# Altium PCB portal.PcbDoc
Units mil, origin at the board's own origin, x right, y up, seen from the top; angles counter-clockwise.
Board outline 2360.35 x 1180 mil, 4 copper layers (Top Layer, GND, ALIMS, Bottom Layer), stack 23.756 mil thick; 21 components, 25 nets, 99 pads, 10 vias.
Unrouted connection lines stored in the file: 27.
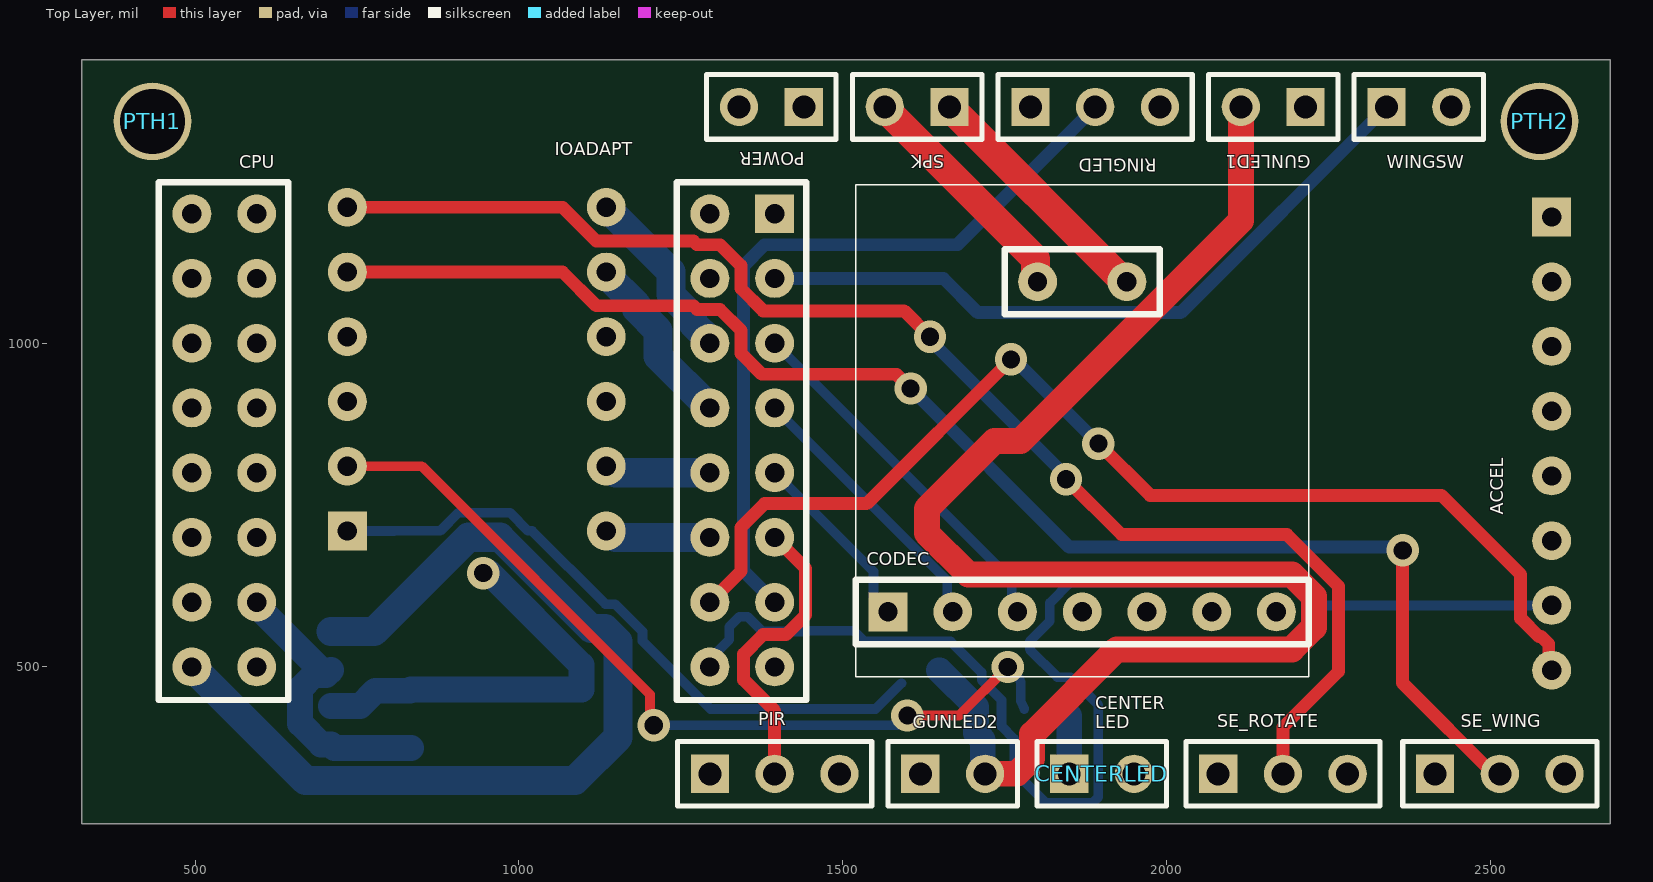
[diagram p0: Top Layer view]
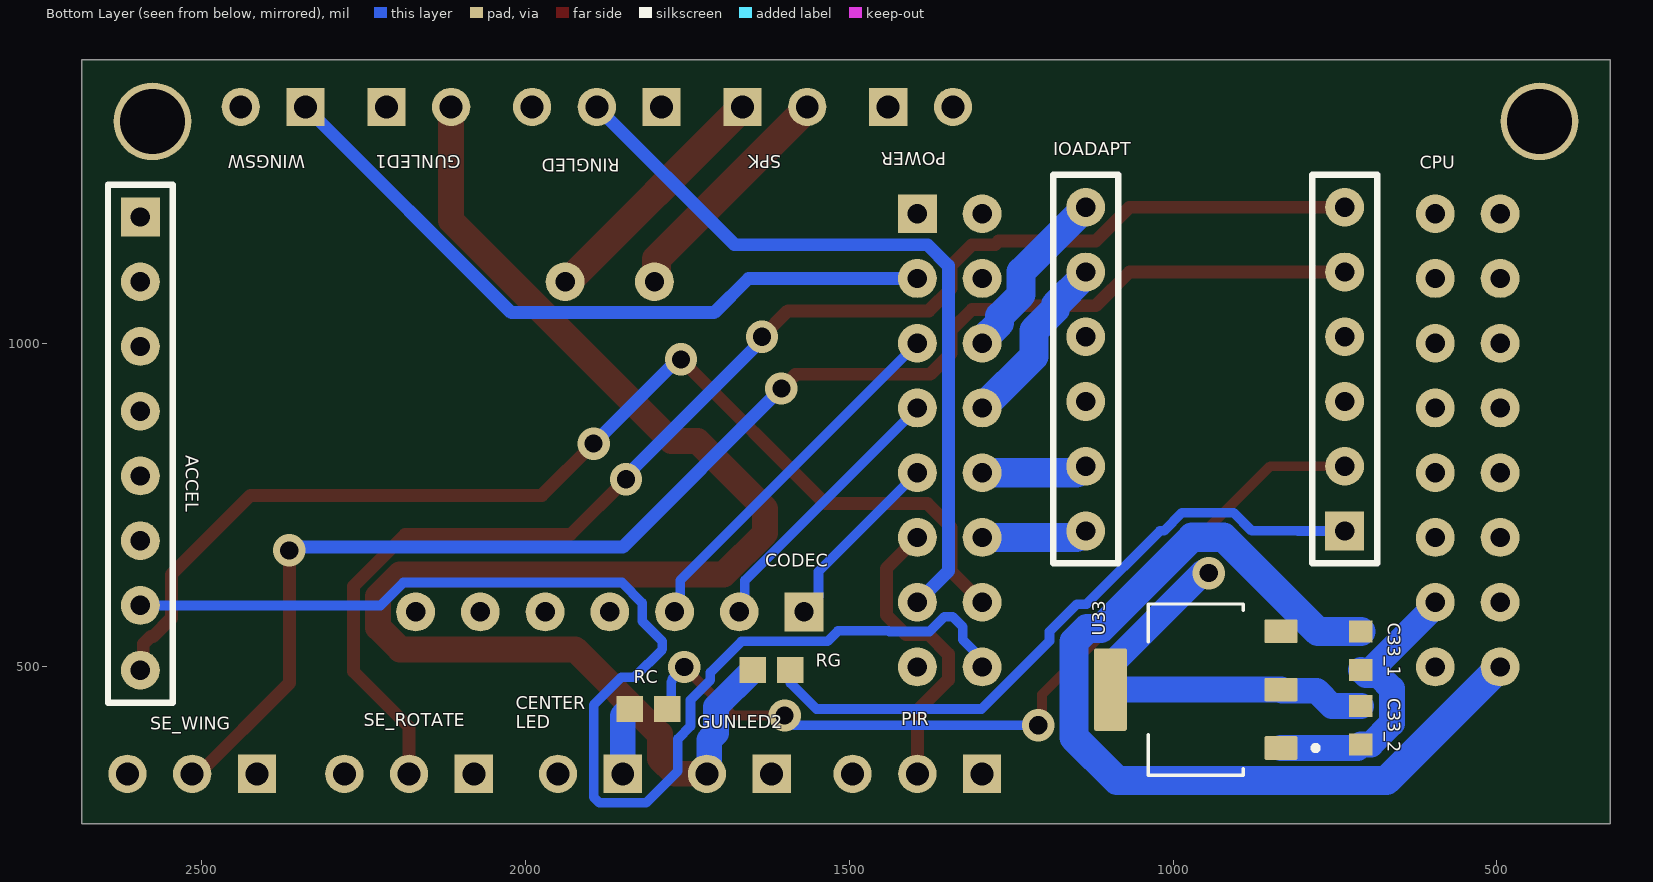
[diagram p1: Bottom Layer view, seen from below]
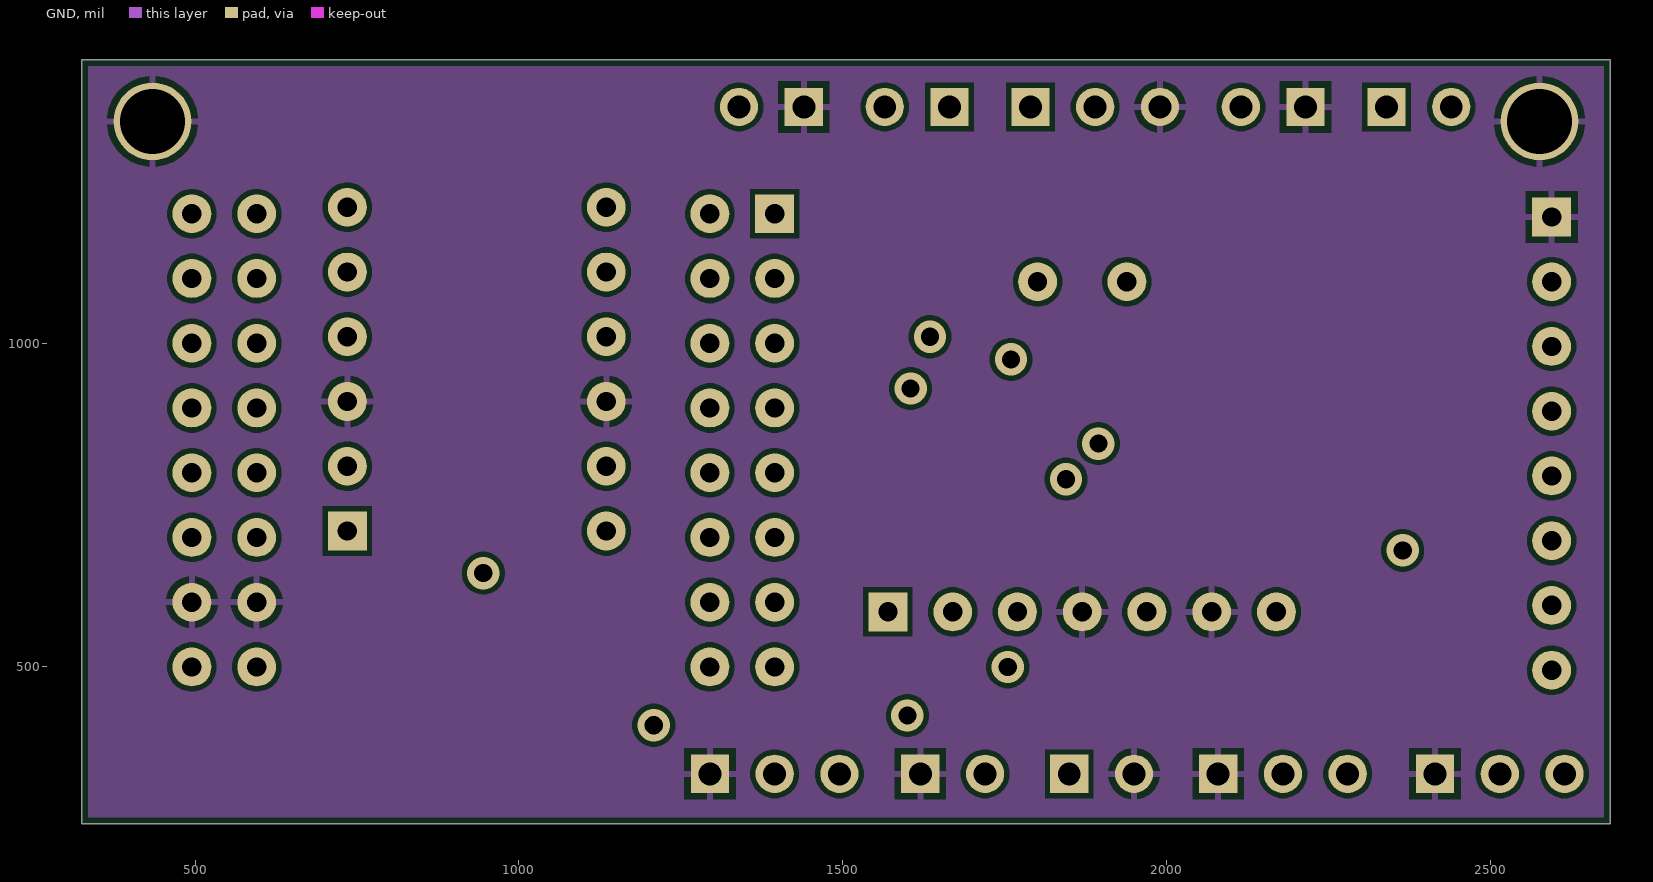
[diagram p2: GND]
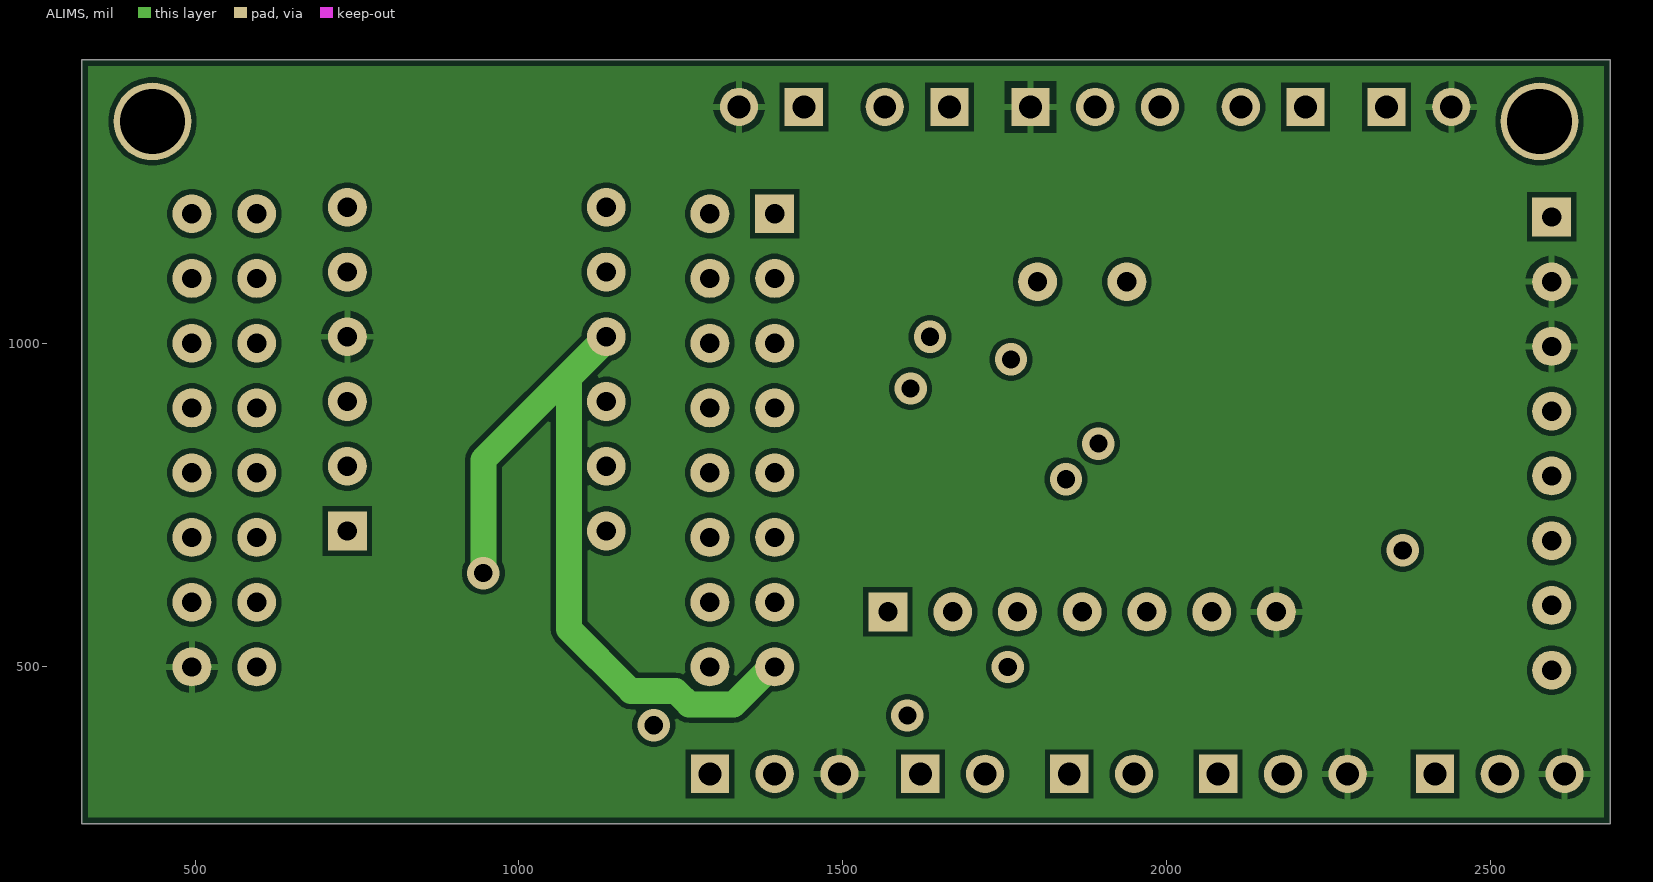
[diagram p3: ALIMS]
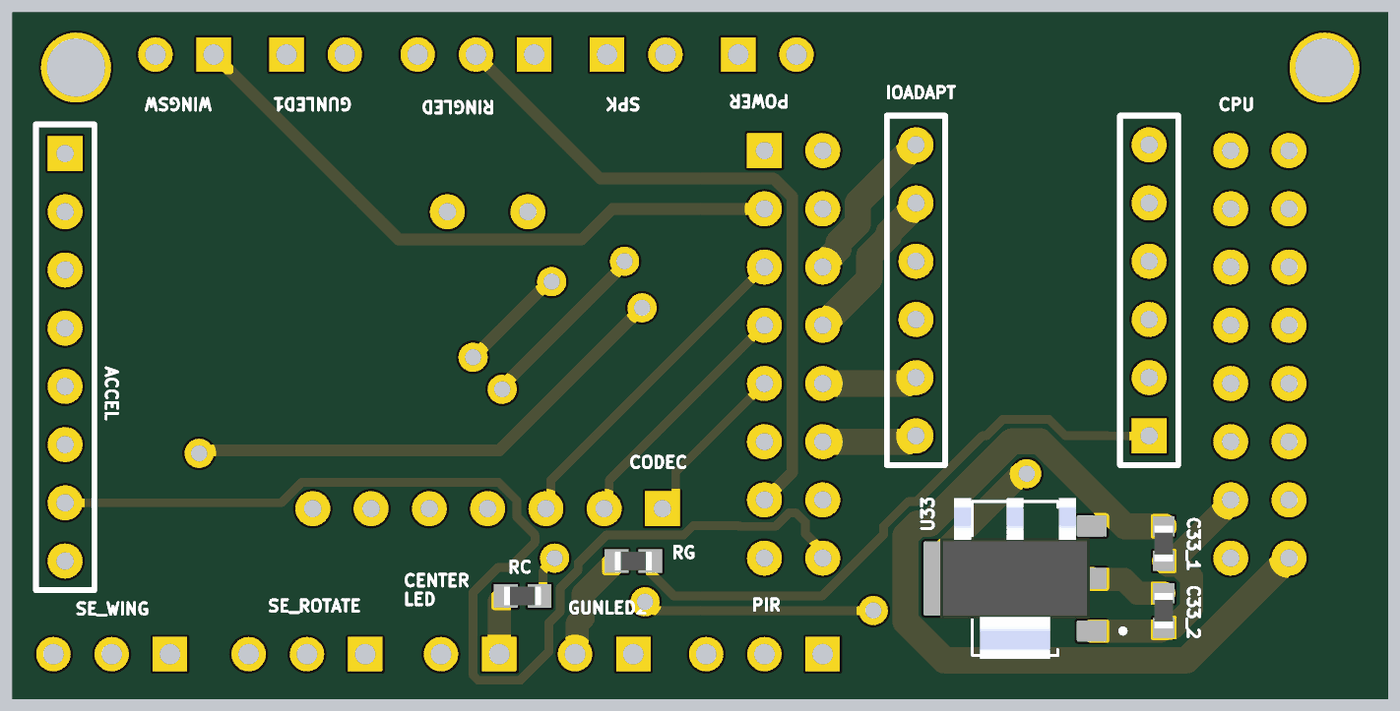
[diagram p4: 3D render of the assembled board from below, using the file's embedded part models]

## Layer stack, top to bottom
Top Solder: solder mask 0.4, Solder Resist, Dk 3.5
Top Layer: signal copper 1.4
Dielectric 2: prepreg 2.8, PP-006, Dk 4.1
GND: signal copper 1.378
Dielectric 1: dielectric 12.6, FR-4, Dk 4.8
ALIMS: signal copper 1.378
Dielectric 3: prepreg 2.8, PP-006, Dk 4.1
Bottom Layer: signal copper 1.4
Bottom Solder: solder mask 0.4, Solder Resist, Dk 3.5

## Board outline
325,257.64 325,1437.64 2685.35,1437.64 2685.35,257.64

## Design rules (kind name [scope] priority, off if disabled: settings)
BoardOutlineClearance [All] p1: gap=10 ignorepadtopadclearanceinfootprint=FALSE except(0: Arc-SplitContinuation Track-SplitContinuation SMDPad-SplitContinuation THPad-SplitContinuation Via-SplitContinuation Fill-SplitContinuation Poly-SplitContinuation Region-SplitContinuation Text-SplitContinuation)
Clearance [All] p1: gap=7.87 ignorepadtopadclearanceinfootprint=FALSE
MinimumSolderMaskSliver [All] p1: minsoldermaskwidth=3
PolygonConnect [All] p1: connectstyle=Relief reliefconductorwidth=10 reliefentries=4 polygonreliefangle="90 Angle" airgapwidth=10
RoomDefinition portal [InComponentClass('portal')] p1: confinementstyle=ConfineIn formatcopy=TRUE lockcomponents=FALSE outline 0,0 2850,0 2850,1680 0,1680
RoutingVias [All] p1: holewidth=28 width=50 viastyle="Through Hole" minholewidth=28 minwidth=50 maxholewidth=28 maxwidth=50
SolderMaskExpansion [All] p1: expansion=4 istentingtop=FALSE
Width [All] p1: maxlimit=45 minlimit=10 preferedwidth=10 minimp=50.000000 maximp=50.000000 favimp=50.000000
29 further rules are at their usual default settings.

## Components (designator, comment, footprint, x,y, rotation, side; value= is the part's Value field where it differs from the comment)
ACCEL "ADXL345" ADXL345 2645,845 r180 bottom
C33_1 "5uF" RESC1508X55N 710,525 r270 bottom value=4.7uF
C33_2 "5uF" RESC1508X55N 710,410 r270 bottom value=4.7uF
CENTERLED "CENTERLED" "HEADER 2" 2000,385 r180 top
CODEC "MAX98357" MAX98357 1870,485 r90 top
CPU "Wemos S2 mini" "WEMOS S2 MINI" 444,149 r0 top
GUNLED1 "" "HEADER 2" 2065,1315 r0 top
GUNLED2 "" "HEADER 2" 1770,385 r180 top
IOADAPT "4 Way IIC I2C Level Conversion Module" IOADAPT 685,660 r90 bottom
PIR "" "HEADER 3" 1545,385 r180 top
POWER "" "HEADER 2" 1290,1315 r0 top
PTH1 "MTSW-101-22-T-S-395" SAMTEC_MTSW-101-22-T-S-395 434.06,1342.64 r0 top
PTH2 "MTSW-101-22-T-S-395" SAMTEC_MTSW-101-22-T-S-395 2576.3,1342.64 r90 top
RC "20R" RESC1607X60N 1810,435 r180 bottom
RG "20R" RESC1607X60N 1620,495 r180 bottom
RINGLED "" "HEADER 3" 2040,1415 r180 top
SE_ROTATE "" "HEADER 3" 2330,385 r180 top
SE_WING "" "HEADER 3" 2665,385 r180 top
SPK "" "HEADER 2" 1515,1315 r0 top
U33 "AMS1117_3V3" SOT229P700X180-4N 965,465 r0 bottom
WINGSW "" "HEADER 2" 2490,1415 r180 top

## Footprints (in the part's own frame and the unit in brackets; to place one, negate y for a bottom-side part, rotate by r counter-clockwise, add the part's x,y. Pads: shape width x height; smd on the part's side, far side on the other; paste and mask are expansions set on the pad)
ADXL345 [mil]
  rect 60x60 hole 30: 1(50,350)
  round 60 hole 30: 2(50,250) 3(50,150) 4(50,50) 5(50,-50) 6(50,-150) 7(50,-250) 8(50,-350)
  silkscreen extent 0,-400 100,400
"HEADER 2" [mm]
  rect 1.5x1.5 hole 0.9: 1(3.81,1.27)
  round 1.5 hole 0.9: 2(1.27,1.27)
  silkscreen extent 0,0 5.08,2.54
"HEADER 3" [mm]
  rect 1.5x1.5 hole 0.9: 1(6.35,1.27)
  round 1.5 hole 0.9: 2(3.81,1.27) 3(1.27,1.27)
  silkscreen extent 0,0 7.62,2.54
IOADAPT [mil]
  rect 60x60 hole 30: 1(50,50)
  round 60 hole 30: 2(150,50) 3(250,50) 4(350,50) 5(450,50) 6(550,50) 7(550,450) 8(450,450) 9(350,450) 10(250,450) 11(150,450) 12(50,450)
  silkscreen extent 0,0 600,500
MAX98357 [mil]
  rect 60x60 hole 30: 1(100,300)
  round 60 hole 30: 2(100,200) 3(100,100) 4(100,0) 5(100,-100) 6(100,-200) 7(100,-300) 8(610,-69) 9(610,69)
  silkscreen extent 0,-350 760,350
RESC1508X55N [mm]
  rect 0.87x0.93 smd: 1(-0.755,0) 2(0.755,0)
  body extent -0.77,-0.4 0.77,0.4, height 0.55
RESC1607X60N [mm]
  rect 1.04x1.02 smd: 1(-0.735,0) 2(0.735,0)
  body extent -0.8,-0.4 0.8,0.4, height 0.55
SAMTEC_MTSW-101-22-T-S-395 [mil]
  round 120 hole 100: 01(0,0)
SOT229P700X180-4N [mm]
  rrect15% 1.31x0.93 smd: 1(-3.345,2.29) 2(-3.345,0) 3(-3.345,-2.29)
  rrect15% 1.31x3.24 smd: 4(3.345,0)
  silkscreen extent -4.8,-3.36 1.86,3.36, body extent -3.25,-3.5 3.25,3.5, height 1.8
"WEMOS S2 MINI" [mil]
  rect 60x60 hole 30: 1(951,1051)
  round 60 hole 30: 2(951,951) 3(951,851) 4(951,751) 5(951,651) 6(951,551) 7(951,451) 8(951,351) 9(851,1051) 10(851,951) 11(851,851) 12(851,751) 13(851,651) 14(851,551) 15(851,451) 16(851,351) 17(51,1051) 18(51,951) 19(51,851) 20(51,751) 21(51,651) 22(51,551) 23(51,451) 24(51,351) 25(151,1051) 26(151,951) 27(151,851) 28(151,751) 29(151,651) 30(151,551) 31(151,451) 32(151,351)
  silkscreen extent 0,300 1000,1100

## Part data
C33_1 C33_2: library part GJM0335C1E220GB01D, Package=None, Availability=Unavailable, MF="{'manufacturer': u'Murata'}", MP=GJM0335C1E220GB01D, Price=None
CENTERLED GUNLED1 GUNLED2 POWER SPK WINGSW: library part "HEADER 2"
IOADAPT: library part "IO Adapt"
PIR RINGLED SE_ROTATE SE_WING: library part "HEADER 3"
PTH1 PTH2: Package=None, Availability=Unavailable, MF="{'manufacturer': u'Samtec'}", MP=MTSW-101-22-T-S-395, Price=None
RC RG: library part RC0603FR-0720RL, Package=None, Availability=Unavailable, MF="{'manufacturer': u'Yageo'}", MP=RC0603FR-0720RL, Price=None
U33: library part AMS1117, "Sot223/Pkg 1-Amp 5-Volt Low Drop Out Voltage Regulatator", Package=None, Availability=Unavailable, MF="{'manufacturer': u'Advanced Monolithic Systems'}", MP=AMS1117, Price=None

## Via types
v1: diameter 50, hole 28, Top Layer to Bottom Layer, 10 vias

## Nets (pads, with @x,y where several pads share a name; then routed paths per layer and width w, separated by ;. In a path a pad name is that pad's centre, name@x,y a point inside that pad or via, vN(x,y) a via of type N, cw(c..) or ccw(c..) an arc to the next point about the centre after c; other vN are vias at no path point)
+3V3: C33_2.1 CPU.8 IOADAPT.9 U33.2 U33.4 | length 1954.7
  ALIMS w40: v1(945,645) 945,820 IOADAPT.9 1135,1004.59 1077.13,946.71 1077.13,558.85 1173.1,462.87 1242.03,462.87 1262.78,442.13 1331.71,442.13 1389.59,500 CPU.8
  Bottom Layer w40: C33_2.1 754.72,439.72 778.31,463.31 831.61,463.31 U33.2 U33.4 1096.69,502.99 954.69,645 v1(945,645)
+5: ACCEL.2 ACCEL.3 C33_1.1 CODEC.7 CPU.24 IOADAPT.4 PIR.3 POWER.2 RINGLED.1 SE_ROTATE.3 SE_WING.3 U33.3 WINGSW.2 | length 1476.3
  Bottom Layer w45: CPU.24 670.53,324.47 1086.42,324.47 1152.85,390.9 1152.85,539.1 1132.8,559.15 1111.77,559.15 970.55,700.37 922.06,700.37 776.41,554.72 C33_1.1
CENTER_LED: CPU.13 IOADAPT.11 | length 164.1
  Bottom Layer w45: IOADAPT.11 1139.06,810 1149.06,800 CPU.13
CO_BCLK: CODEC.2 CPU.4 | length 428.9
  Bottom Layer w15: CPU.4 1661.39,633.61 1661.39,593.61 CODEC.2
CO_DIN: CODEC.3 CPU.3 | length 570.3
  Bottom Layer w15: CPU.3 1761.39,633.61 1761.39,593.61 CODEC.3
CO_LRC: CODEC.1 CPU.5 | length 287.5
  Bottom Layer w15: CPU.5 1547.5,647.5 1547.5,607.5 CODEC.1
GND: ACCEL.1 C33_1.2 C33_2.2 CENTERLED.2 CODEC.4 CODEC.6 CPU.23 CPU.31 GUNLED1.1 GUNLED2.1 IOADAPT.3 IOADAPT.10 PIR.1 POWER.1 PTH1.01 PTH2.01 RINGLED.3 SE_ROTATE.1 SE_WING.1 U33.1 | length 446.5
  Bottom Layer w40: CPU.31 595,594.87 C33_1.2@694.6,495.28 ; C33_1.2 702.32,487.6 683.02,487.6 662.13,466.7 662.13,412.75 694.6,380.28 C33_2.2 715.43,374.84 U33.1
GUN_LEDS: CPU.14 IOADAPT.12 | length 164.1
  Bottom Layer w45: IOADAPT.12 1139.06,710 1149.06,700 CPU.14
MMWAVE_RX: CPU.10
MMWAVE_TX: CPU.9
NetCENTERLED_1: CENTERLED.1 RC.1 | length 104.8
  Bottom Layer w40: RC.1 1839.33,435 1850,424.33 CENTERLED.1
NetCODEC_8: CODEC.8 SPK.1 | length 385.8
  Top Layer w45: SPK.1 1935,1095 CODEC.8
NetCODEC_9: CODEC.9 SPK.2 | length 367.8
  Top Layer w45: SPK.2 1565,1362.99 1798.13,1129.86 1798.13,1097.87 CODEC.9
NetCPU_7: CPU.7 RINGLED.2 | length 1184.1
  Bottom Layer w20: CPU.7 1395,600.05 1347.13,647.93 1347.13,1119.83 1379.42,1152.13 1677.13,1152.13 RINGLED.2
NetGUNLED1_2: GUNLED1.2 GUNLED2.2 RG.1 | length 2382.3
  Top Layer w40: GUNLED2.2 1769.17,335 1792.6,358.43 1792.6,396.29 1923.43,527.13 2193.97,527.13 2227.87,561.03 2227.87,608.97 2193.97,642.87 1693.97,642.87 1630,706.85 1630,744.42 1734.37,848.79 1774.63,848.79 2115,1189.15 GUNLED1.2
  Bottom Layer w40: RG.1 1649.02,494.92 1649.41,494.92 1705.98,438.35 1705.98,397.77 1716.35,387.39 1716.35,338.65 GUNLED2.2
NetIOADAPT_1: IOADAPT.1 RG.2 | length 1018.5
  Bottom Layer w15: IOADAPT.1 806.92,710 807.3,710.37 878.5,710.37 906.38,738.25 986.24,738.25 1014.11,710.37 1020.46,710.37 1133.8,597.03 1148.48,597.03 1190.73,554.78 1190.73,540.1 1295.83,435 1550.67,435 1590.67,475 RG.2@1591.06,475
NetIOADAPT_2: IOADAPT.2 RC.2 | length 1321.5
  Top Layer w15: IOADAPT.2 850,810 1202.5,457.5 1202.5,415.73 v1(1208.23,410) ; v1(1600,425) 1680,425 v1(1755,500)
  Bottom Layer w15: v1(1208.23,410) 1585,410 v1(1600,425) ; v1(1755,500) 1773.07,481.93 1775,477.01 1775,447.58 RC.2@1780.67,435
NetIOADAPT_5: IOADAPT.5 SE_WING.2 | length 2238.9
  Top Layer w20: IOADAPT.5 1067.3,1110 1119.42,1057.87 1269.42,1057.87 1275.17,1052.13 1310.58,1052.13 1342.87,1019.83 1342.87,984.42 1375.17,952.13 1582.87,952.13 v1(1605,930) ; v1(2365,680) 2365,475 SE_WING.2@2510,330
  Bottom Layer w20: v1(1605,930) 1850,685 2360,685 v1(2365,680)
NetIOADAPT_6: IOADAPT.6 SE_ROTATE.2 | length 2125
  Top Layer w20: IOADAPT.6 1067.3,1210 1119.42,1157.87 1269.42,1157.87 1275.17,1152.13 1310.58,1152.13 1342.87,1119.83 1342.87,1084.42 1377.21,1050.08 1594.92,1050.08 v1(1635,1010) ; v1(1845,790) 1930.54,704.46 2185.95,704.46 2265.75,624.66 2265.75,493.04 2180,407.3 SE_ROTATE.2
  Bottom Layer w20: v1(1635,1010) 1635,1005 1845,795 v1(1845,790)
PIR: CPU.6 PIR.2 | length 465.1
  Top Layer w20: PIR.2 1395,432.3 1347.13,480.17 1347.13,519.83 1377.3,550 1412.7,550 1442.87,580.17 1442.87,652.13 CPU.6
SCL: ACCEL.8 CPU.15 | length 1754.6
  Top Layer w20: CPU.15 1342.87,647.87 1342.87,715.58 1379.42,752.13 1537.13,752.13 v1(1760,975) ; v1(1895,845) 1975,765 2425,765 2547.13,642.87 2547.13,575.17 2575.17,547.13 2578.84,547.13 2590.56,535.41 2590.56,499.44 ACCEL.8
  Bottom Layer w20: CPU.15@1295,599.95 CPU.15 ; v1(1760,975) 1765,975 v1(1895,845)
SDA: ACCEL.7 CPU.16 | length 2005.6
  Bottom Layer w15: CPU.16 1295,512.18 1324.82,542 1324.82,561.64 1340.79,577.61 1353.22,577.61 1376.21,554.63 1438.4,554.63 1439.53,555.75 1517.51,555.75 1533.63,539.63 1666.6,539.63 1714.63,491.6 1714.63,479.73 1745.22,449.14 1745.22,408.55 1764.9,388.87 1764.9,339.3 1814.1,290.1 1885.9,290.1 1894.9,299.1 1894.9,441.33 1851.97,484.26 1831.73,484.26 1788.79,527.2 1788.79,539.63 1820,570.83 1820,599.17 1851.21,630.37 2188.79,630.37 2224.17,595 ACCEL.7
SERVO_ROTATE: CPU.12 IOADAPT.8 | length 276.3
  Bottom Layer w45: IOADAPT.8 1135,1105.94 1181.75,1059.19 1181.75,1053.09 1215,1019.84 1215,980 CPU.12
SERVO_WINGS: CPU.11 IOADAPT.7 | length 276.3
  Bottom Layer w45: IOADAPT.7 1234.63,1110.37 1234.63,1074.99 1267.87,1041.74 1267.87,1031.18 1295,1004.06 CPU.11
WING_SWITCH: CPU.2 WINGSW.1 | length 1098.6
  Bottom Layer w20: CPU.2 1655.89,1100 1708.76,1047.13 2022.13,1047.13 WINGSW.1
pads on no net: ACCEL.4 ACCEL.5 ACCEL.6 CODEC.5 CPU.1 CPU.17 CPU.18 CPU.19 CPU.20 CPU.21 CPU.22 CPU.25 CPU.26 CPU.27 CPU.28 CPU.29 CPU.30 CPU.32

## Polygon pours and split planes (outlines as drawn)
GND on GND "GND_L02_P000" (solid, pour order 0): 115,1525 180,1460 180,130 2800,130 2815,145 2765,195 2765,1525
+5 on ALIMS "+5_L03_P002" (solid, pour order 2): 210,1515 225,1500 2720,1500 2720,195 2705,210 235,210

## Silkscreen, mask and mechanical layers (free items; w line width, h text height)
Top Overlay:
  text "IOADAPT" at 1055,1290 h20
  text "ACCEL" at 2520,735 h20 r90
  text "CENTER / LED" at 1890,405 h20
Bottom Overlay:
  text "POWER" at 1350,1295 h20 r180
  text "SPK" at 1605,1290 h20 r180
  text "GUNLED1" at 2100,1290 h20 r180
  text "WINGSW" at 2340,1290 h20 r180
  text "RINGLED" at 1855,1285 h20 r180
  text "CPU" at 619.01,1269.55 h20
  text "CODEC" at 1630,655 h20
  text "PIR" at 1420,410 h20
  text "SE_ROTATE" at 2250,408.33 h20
  text "GUNLED2" at 1735,405 h20
  text "CENTER / LED" at 2015,405 h20
  text "SE_WING" at 2580,403.33 h20
Mechanical 1:
  lines w10: 1634.83,1678.75 1635.59,1678.75 ; 325,257.64 325,1437.64 2685.35,1437.64 2685.35,257.64 325,257.64